# Altium PCB MDBT42Q - Copy.PcbDoc
Units mm, origin at the board's own origin, x right, y up, seen from the top; angles counter-clockwise.
Board outline 52.07 x 30.48 mm, 2 copper layers (Top Layer, Bottom Layer); 11 components, 14 nets, 82 pads, 3 vias.
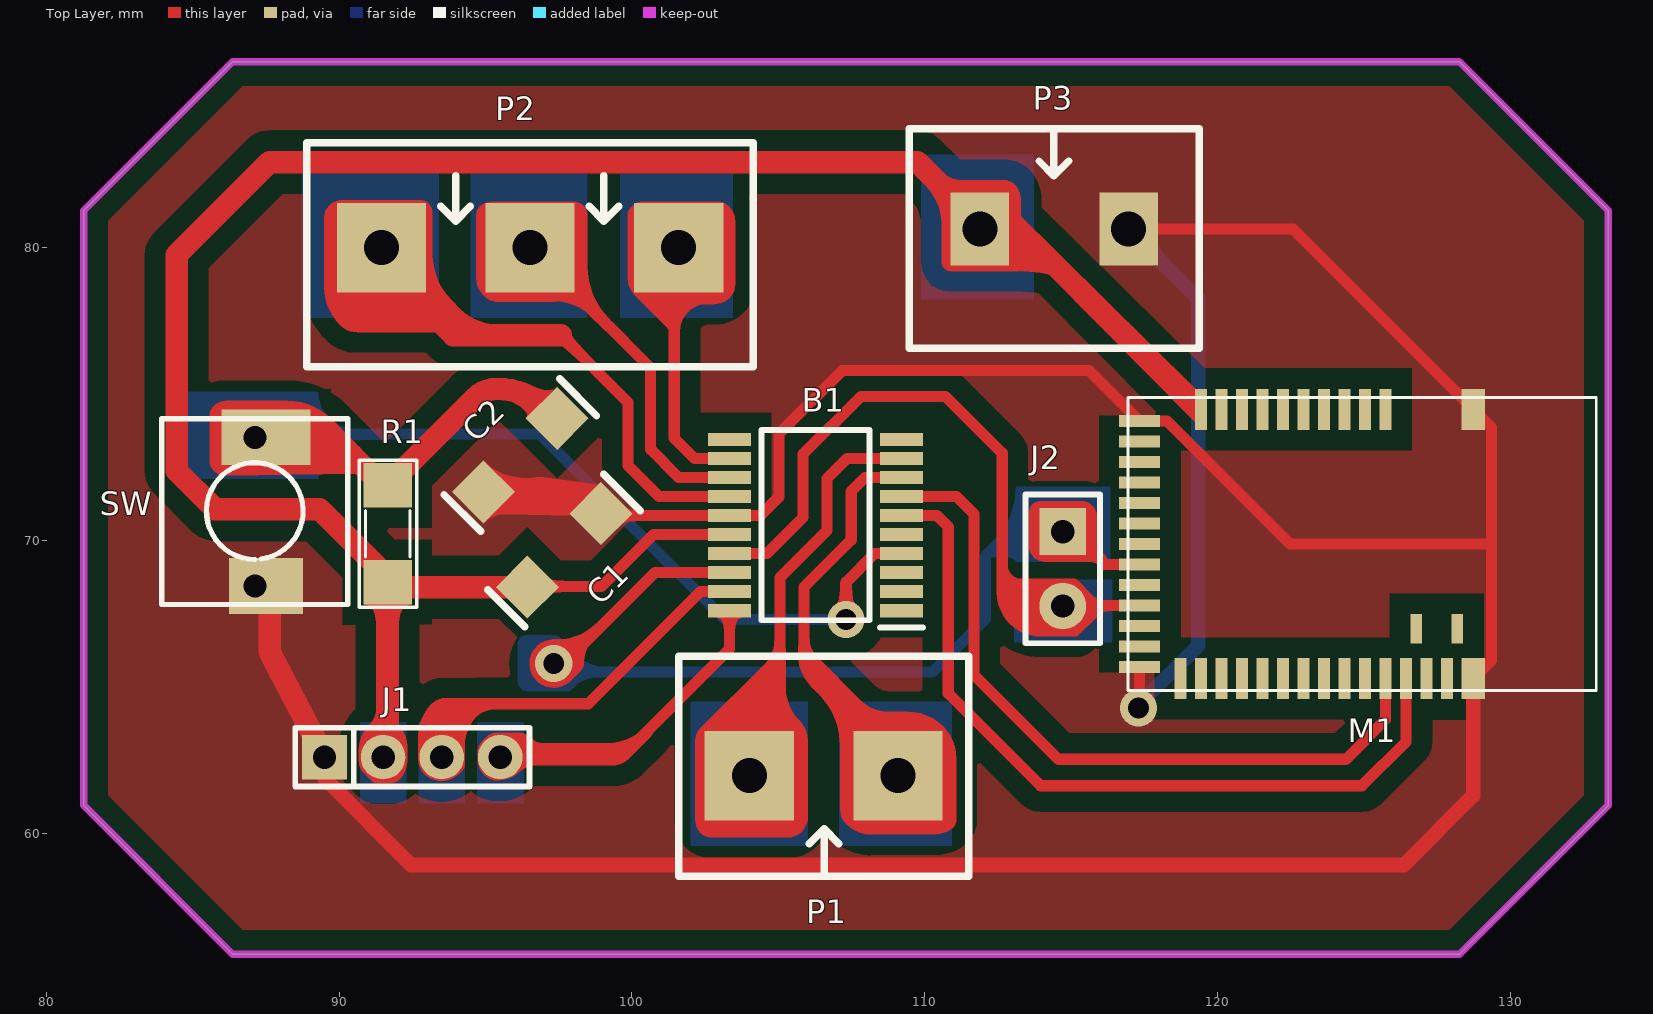
[diagram p0: Top Layer view]
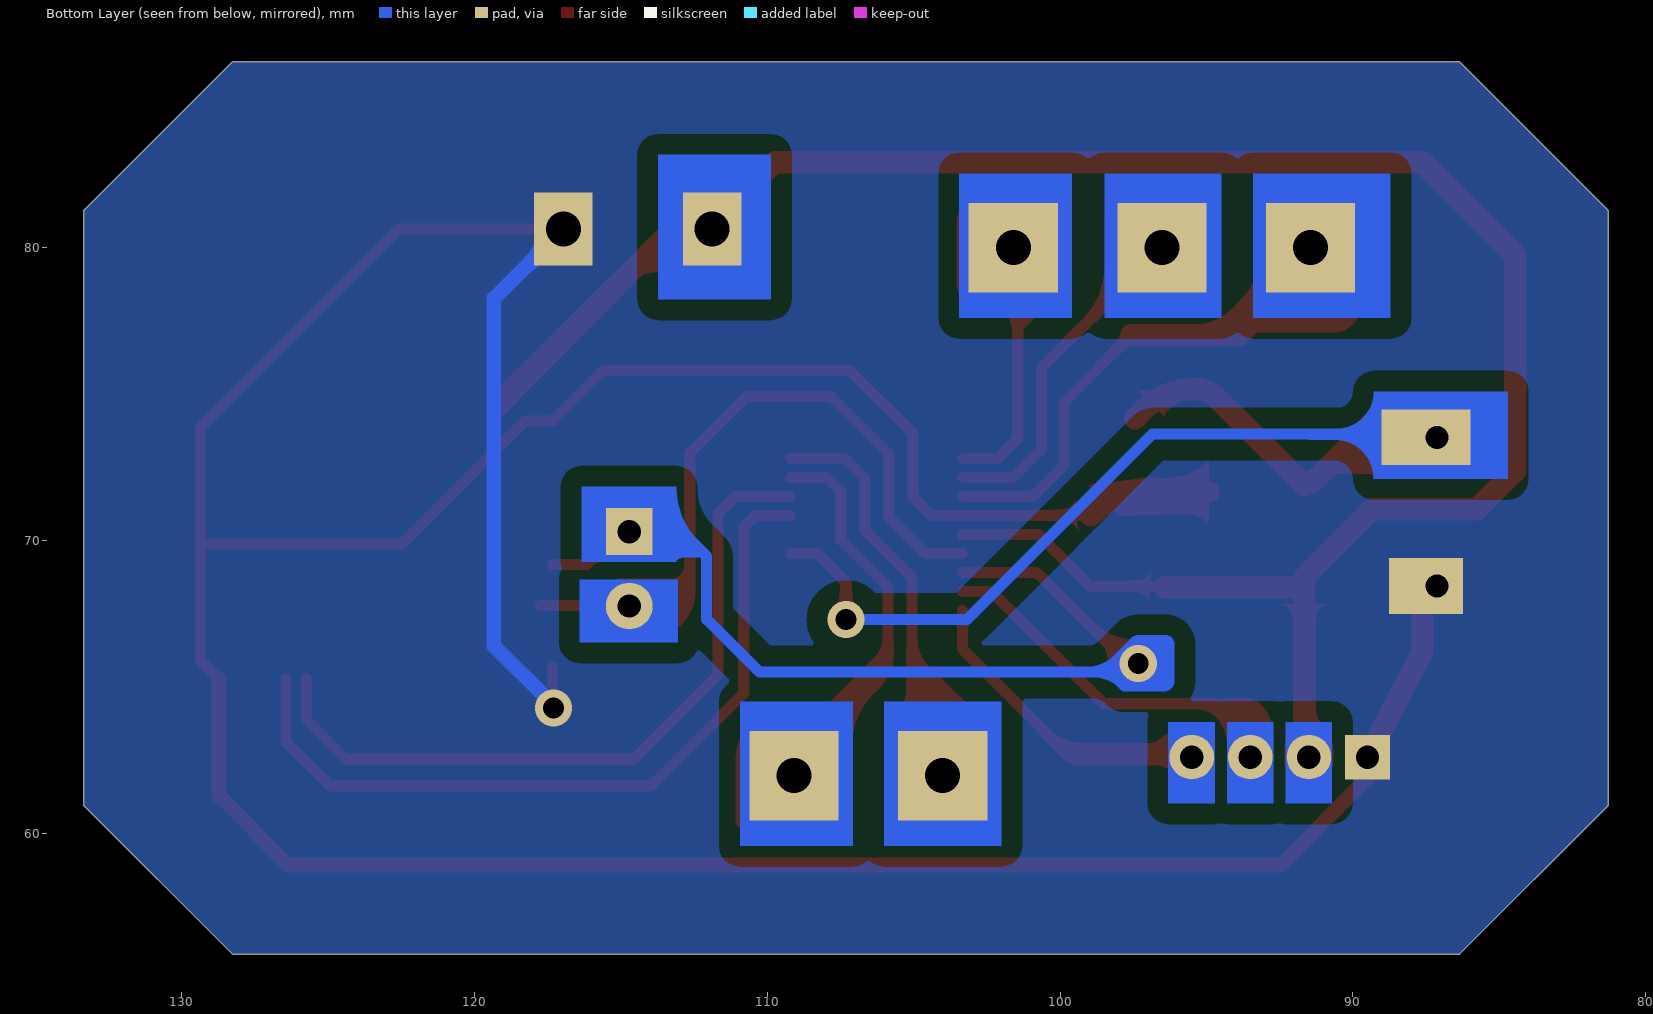
[diagram p1: Bottom Layer view, seen from below]
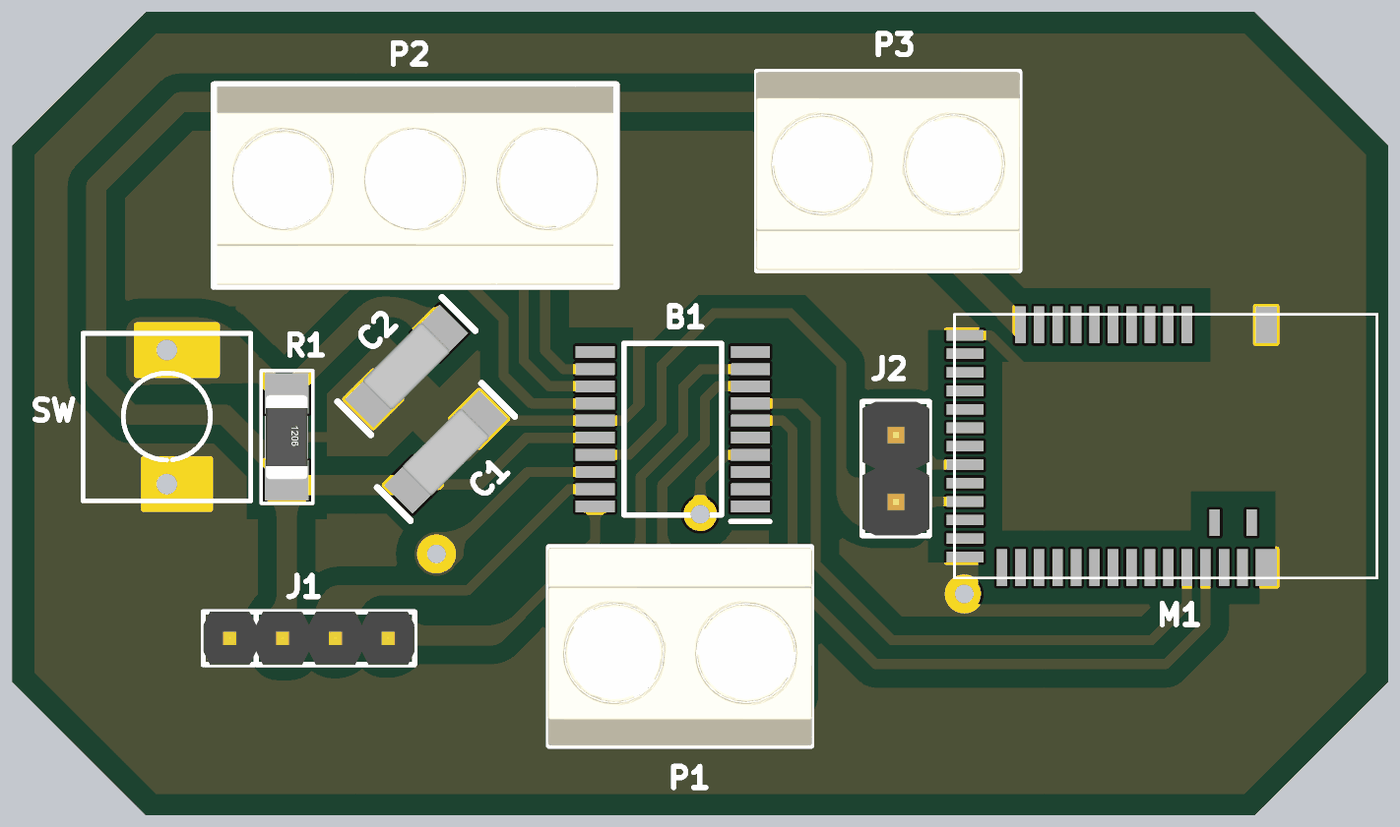
[diagram p2: 3D render of the assembled board from above, using the file's embedded part models]

## Layer stack, top to bottom
Top Solder: solder mask 0.0102, Solder Resist, Dk 3.5
Top Layer: signal copper 0.0356
Dielectric1: dielectric 0.32, FR-4, Dk 4.8
Bottom Layer: signal copper 0.0356
Bottom Solder: solder mask 0.0102, Solder Resist, Dk 3.5

## Board outline
81.28,60.96 86.36,55.88 128.27,55.88 133.35,60.96 133.35,81.28 128.27,86.36 86.36,86.36 81.28,81.28

## Design rules (kind name [scope] priority, off if disabled: settings)
Clearance Clearance_1 [InNamedPolygon('NONET_L01_P002')] p1: gap=0.7
Clearance [All] p2: gap=0.7
PlaneClearance [All] p1: clearance=1
PlaneConnect [All] p1: planeconnectstyle=Direct reliefexpansion=0.508 reliefentries=4 reliefconductorwidth=0.254 reliefairgap=0.254
PolygonConnect [All] p1: connectstyle=Direct reliefconductorwidth=0.254 reliefentries=4 polygonreliefangle="90 Angle" airgapwidth=0.254
RoutingVias [All] p1: holewidth=0.711 width=1.27 viastyle="Through Hole" minholewidth=0.711 minwidth=1.27 maxholewidth=0.711 maxwidth=1.27
SolderMaskExpansion [All] p1: expansion=0.102
Width [All] p1: maxlimit=0.762 minlimit=0.381 preferedwidth=0.508
28 further rules are at their usual default settings.

## Classes and differential pairs
component class MDBT42Q: B1 C1 C2 J1 J2 P1 P2 P3 R1 SW

## Components (designator, comment, footprint, x,y, rotation, side; value= is the part's Value field where it differs from the comment)
B1 "STM32F070F6P6" SOP65P640X120-20N 106.274,70.536 r180 top
C1 "10u" C1206 97.688,69.672 r45 top
C2 "100n" C1206 96.19,72.923 r225 top
J1 "JP4x1-2.0" J4-D1T 92.504,62.611 r0 top
J2 "JP2" JP2-D1T 114.72,70.31 r270 top
M1 "MODULE_MDBT42Q" PCB_MDBT42Q_10X16 132.94,69.89 r270 top
P1 "Header 2 - M" "Medium - Header 2"#1 106.553,61.976 r180 top
P2 "Header 3 - M" "Medium - Header 3" 101.6,80.01 r180 top
P3 "Header 4 - M" "Medium - Header 2"#2 114.427,80.645 r0 top
R1 "RESISTOR SMD" RES-SM-1206 91.66,71.89 r270 top
SW "SW" SW2 87.122,73.533 r270 top

## Footprints (in the part's own frame and the unit in brackets; to place one, negate y for a bottom-side part, rotate by r counter-clockwise, add the part's x,y. Pads: shape width x height; smd on the part's side, far side on the other; paste and mask are expansions set on the pad)
C1206 [mil]
  rect 60x60 smd: 1(-70,0) 2(70,0)
  silkscreen extent -110,-35 110,35, body extent -63,-35 63,35, height 40
J4-D1T [mm] "4 pins, 1 row, straight, gold plating"
  rect 1.524x1.524 hole 0.8: 1(-3,0)
  round 1.524 hole 0.8: 2(-1,0) 3(1,0) 4(3,0)
  silkscreen extent -4,-1 4,1, body extent -4,-1 4,1, height 6.01
JP2-D1T [mm] "2 pins, 1 row, straight, gold plating"
  rect 1.6x1.6 hole 0.8: 1(0,0)
  round 1.6 hole 0.8: 2(2.54,0)
  silkscreen extent -1.27,-1.27 3.81,1.27, body extent -1.27,-1.27 3.81,1.27, height 8.54
"Medium - Header 2"#1 [mil]
  rect 120x120 hole 47.24: 1(-100,0) 2(100,0)
  silkscreen extent -195,-161 195,135, body extent -197,-160 197,135, height 394
"Medium - Header 2"#2 [mil]
  rect 78.74x98.43 hole 47.24: 1(-100,0) 2(100,0)
  silkscreen extent -195,-160 195,135, body extent -197,-160 197,135, height 394
"Medium - Header 3" [mil]
  rect 120x120 hole 47.24: 1(0,0) 2(200,0) 3(399.5,0)
  silkscreen extent -100,-141 500,160, body extent -95,-138 495,157, height 394
PCB_MDBT42Q_10X16 [mm]
  rect 1.4x0.8 smd: 1(-4.6,-4.2) 39(4.6,-4.2)
  rect 1.4x0.4 smd: 2(-4.6,-7.2) 3(-4.6,-7.9) 4(-4.6,-8.6) 5(-4.6,-9.3) 6(-4.6,-10) 7(-4.6,-10.7) 8(-4.6,-11.4) 9(-4.6,-12.1) 10(-4.6,-12.8) 11(-4.6,-13.5) 25(4.6,-14.2) 26(4.6,-13.5) 27(4.6,-12.8) 28(4.6,-12.1) 29(4.6,-11.4) 30(4.6,-10.7) 31(4.6,-10) 32(4.6,-9.3) 33(4.6,-8.6) 34(4.6,-7.9) 35(4.6,-7.2) 36(4.6,-6.5) 37(4.6,-5.8) 38(4.6,-5.1)
  rect 0.4x1.4 smd: 12(-4.2,-15.6) 13(-3.5,-15.6) 14(-2.8,-15.6) 15(-2.1,-15.6) 16(-1.4,-15.6) 17(-0.7,-15.6) 18(0,-15.6) 19(0.7,-15.6) 20(1.4,-15.6) 21(2.1,-15.6) 22(2.8,-15.6) 23(3.5,-15.6) 24(4.2,-15.6)
  rect 1x0.4 smd: 40(2.9,-4.75) 41(2.9,-6.15)
  silkscreen extent -5,-16 5,0
RES-SM-1206 [mil]
  rect 60x65 smd: 1(0,0) 2(130,0)
  silkscreen extent -34,-38 164,39, body extent 2,-31 128,32, height 40
SOP65P640X120-20N [mm]
  rect 1.475x0.45 smd: 1(-2.938,2.925) 2(-2.938,2.275) 3(-2.938,1.625) 4(-2.938,0.975) 5(-2.938,0.325) 6(-2.938,-0.325) 7(-2.938,-0.975) 8(-2.938,-1.625) 9(-2.938,-2.275) 10(-2.938,-2.925) 11(2.938,-2.925) 12(2.938,-2.275) 13(2.938,-1.625) 14(2.938,-0.975) 15(2.938,-0.325) 16(2.938,0.325) 17(2.938,0.975) 18(2.938,1.625) 19(2.938,2.275) 20(2.938,2.925)
  silkscreen extent -3.68,-3.25 1.85,3.5
SW2 [mil] "SW button 2pin, 250x 250 mil"
  rect 75x120 hole 31 copper offset 0,15: 1(0,0)
  rect 75x100 hole 31 copper offset 0,15: 2(200,0)
  silkscreen extent -25,-125 225,125

## Part data
B1: "STMICROELECTRONICS - STM32F070F6P6 - MCU, 32BIT, CORTEX-M0, 48MHZ, TSSOP-20"
C1 C2: library part "Cap SMD 1206"
J1: "WR-PHD 2.00 mm Socket Header"
J2: "WR-PHD 2.54 mm Angled Socket Header"
M1: "MDBT42Q"
P1: "Header, 2-Pin, Medium"
P2: "Header, 3-Pin, Medium"
P3: library part "Header 2 - M", "Header, 2-Pin, Medium"
R1: "Resistor"
SW: library part "Tact SW - 2Pin", "Switch button 2 pin"

## Via types
v1: diameter 1.27, hole 0.711, Top Layer to Bottom Layer, 3 vias

## Nets (pads, with @x,y where several pads share a name; then routed paths per layer and width w, separated by ;. In a path a pad name is that pad's centre, name@x,y a point inside that pad or via, vN(x,y) a via of type N, cw(c..) or ccw(c..) an arc to the next point about the centre after c; other vN are vias at no path point)
32>52: B1.17 J2.2 M1.21 | length 23.6
  Top Layer w0.381: B1.17 104.613,69.561 105.85,70.798 105.85,72.957 107.823,74.93 110.714,74.93 112.65,72.994 112.65,68.21 113.12,67.74 J2.2@114.39,67.74 ; J2.2@114.44,67.79 M1.21 M1.21@117.75,67.79
52>32: B1.18 J2.1 M1.19 | length 36.4
  Top Layer w0.254: 97.972,66.095 cw(c97.331,65.805) 98.035,65.805 cw(c97.331,65.805) 97.972,66.095
  Top Layer w0.381: v1(97.331,65.805) 97.682,65.805 97.972,66.095 100.788,68.911 B1.18 ; J2.1@114.13,70.28 115.09,70.28 116.18,69.19 M1.19
  Bottom Layer w0.381: v1(97.331,65.805) 97.303,65.805 97.594,65.515 110.275,65.515 112.08,67.32 112.08,69.47 112.89,70.28 114.16,70.28 J2.1@114.75,69.69
+3.3V: B1.16 C1.1 J1.2 M1.11 P3.1 R1.2 | length 74.3
  Top Layer w0.381: R1.2@91.719,68.529 91.74,68.55 R1.2@91.875,68.415 ; C1.1 96.456,68.44 98.969,68.44 100.74,70.211 B1.16 ; P3.1 113.086,80.645 M1.11@119.241,74.49
  Top Layer w0.5: J1.2 ccw(c91.127,62.988) J1.2@91.66,62.988
  Top Layer w0.762: J1.2@91.66,62.988 R1.2 ccw(c91.269,68.588) 91.545,68.865 89.33,71.08 85.765,71.08 84.455,72.39 84.455,79.756 87.63,82.931 109.753,82.931 P3.1@111.963,80.721 ; R1.2@91.875,68.415 C1.1
CLK: B1.20 J1.4 | length 10.7
  Top Layer w0.381: J1.4 99.648,62.611 103.336,66.299 B1.20
DIO: B1.19 J1.3 | length 12.5
  Top Layer w0.381: J1.3 93.504,63.219 94.718,64.433 98.513,64.433 102.341,68.261 B1.19
GND: B1.15 C1.2 C2.2 J1.1 M1.1 M1.12 M1.24 M1.39 P3.2 SW.2 | length 136.7
  Top Layer w0.381: C1.2@98.946,70.861 B1.15 104.389,70.861 105.03,71.502 105.03,73.661 107.188,75.819 115.611,75.819 M1.12 118.28,74.09 122.48,69.89 129.36,69.89 ; P3.2 122.585,80.645 M1.1 129.36,73.87 129.36,69.89 ; v1(117.31,64.29) 117.34,64.32 M1.24 ; M1.39 129.36,65.91 129.36,69.89
  Top Layer w0.5: J1.1 89.504,61.88 92.46,58.924 126.364,58.924 128.74,61.3 M1.39
  Top Layer w0.762: SW.2@87.63,68.58 87.63,66.214 J1.1 ; C2.2 97.088,71.666 cw(c97.088,69.126) 98.877,70.929 cw(c97.088,69.126) 98.884,70.922 C1.2@98.946,70.861
  Bottom Layer w0.5: P3.2 119.34,78.272 119.34,66.42 117.385,64.465 v1@117.385,64.215
MD_RESET: B1.7 M1.35 | length 25.4
  Top Layer w0.381: B1.7 111.089,71.511 111.69,70.91 111.69,65.419 114.574,62.536 124.386,62.536 125.74,63.89 M1.35
NetB1_4: B1.4 C2.1 R1.1 SW.1 | length 38.2
  Top Layer w0.381: R1.1@91.563,71.987 R1.1 R1.1@91.74,71.81 ; v1(107.315,67.31) 107.315,68.58 108.296,69.561 B1.4
  Top Layer w0.762: SW.1@87.63,73.66 88.655,73.66 cw(c88.655,71.12) 89.584,73.484 cw(c88.655,71.12) 90.451,72.916 91.38,71.987 R1.1@91.563,71.987 ; R1.1 94.645,74.875 cw(c95.392,74.128) 95.392,75.184 cw(c95.392,72.644) 97.188,74.44 C2.1
  Bottom Layer w0.381: SW.1@87.53,73.64 87.63,73.64 96.85,73.64 103.18,67.31 v1(107.315,67.31)
PWM_WHITE: B1.12 P2.1 | length 8.7
  Top Layer w0.381: P2.1 101.448,79.858 101.448,73.508 102.144,72.811 B1.12
PWM_X: B1.14 P2.3 | length 17
  Top Layer w0.381: 97.58,77.02 99.873,74.727 99.873,72.568 100.93,71.511 B1.14
  Top Layer w0.762: P2.3 91.453,79.471 93.904,77.02 97.58,77.02
PWM_YELLOW: B1.13 P2.2 | length 11.7
  Top Layer w0.381: P2.2 100.635,75.895 100.635,73.127 101.601,72.161 B1.13
SWDCLK: B1.6 M1.36 | length 27.2
  Top Layer w0.381: B1.6 110.416,70.861 110.81,70.467 110.81,64.78 113.956,61.634 124.944,61.634 126.44,63.13 M1.36
USART2_RX: B1.9 P1.2 | length 14.2
  Top Layer w0.381: P1.2 103.81,62.179 103.81,64.55 105.06,65.8 105.06,68.738 106.67,70.348 106.67,72.126 107.355,72.811 B1.9
USART2_TX: B1.8 P1.1 | length 13.6
  Top Layer w0.381: P1.1 109.093,62.767 105.88,65.98 105.88,68.415 107.493,70.028 107.493,71.683 107.971,72.161 B1.8
pads on no net: B1.1 B1.2 B1.3 B1.5 B1.10 B1.11 M1.2 M1.3 M1.4 M1.5 M1.6 M1.7 M1.8 M1.9 M1.10 M1.13 M1.14 M1.15 M1.16 M1.17 M1.18 M1.20 M1.22 M1.23 M1.25 M1.26 M1.27 M1.28 M1.29 M1.30 M1.31 M1.32 M1.33 M1.34 M1.37 M1.38 M1.40 M1.41

## Polygon pours and split planes (outlines as drawn)
GND on Top Layer "GND_L01_P009" (solid, pour order 9): 86.36,86.36 81.28,81.28 81.28,60.96 86.36,55.88 128.27,55.88 133.35,60.96 133.35,81.28 128.27,86.36
GND on Bottom Layer "GND_L02_P007" (solid, pour order 7): 86.36,86.36 128.27,86.36 133.35,81.28 133.35,60.96 128.27,55.88 86.36,55.88 81.28,60.96 81.28,81.28

## Keep-outs
Top Layer:
  the board outline again, w0.254

## Other copper
Top Layer:
  region net +3.3V: 114.254,79.09 119.28,74.02 119.25,75.19 113.12,81.25
  region: 88.138,65.405
  region net GND: 98.171,71.819
  region: 92.369,69.633
  region net NetB1_4: 90.594,73.306 89.757,74.143 ccw(c88.229,72.615) 88.229,74.776 86.117,74.776 ccw(c86.117,74.239) 85.58,74.239 85.58,72.755 ccw(c86.121,72.755) 86.121,72.214 90.552,72.285 90.892,72.259
  region net 32>52: 112.84,69.16 ccw(c113.3,69.16) 113.3,68.7 114.082,68.7 ccw(c114.311,68.432) 113.96,68.46 ccw(c113.973,68.143) 113.74,68.358 113.74,67.791 ccw(c113.651,67.791) 113.651,67.88 112.69,67.88
  region net 32>52: 114.164,66.73 113.97,66.73 cw(c113.97,68.24) 112.46,68.24 113.74,67.791
  region net 32>52: 116.1,67.97 cw(c116.1,68.453) 115.759,68.111 115.21,68.66 ccw(c115.113,68.563) 115.113,68.7 114.12,68.7 ccw(c114.12,68.32) 113.74,68.32 113.74,67.262 ccw(c114.27,67.26) 114.27,66.73 115.22,66.73 115.949,67.459 cw(c116.29,67.117) 116.29,67.6
  region net 52>32: 115.89,70.81 ccw(c115.35,70.81) 115.35,71.35 113.96,71.35 ccw(c113.96,70.96) 113.57,70.96 113.57,69.814 ccw(c114.094,69.814) 114.094,69.29 114.8,69.29 115.41,69.29 115.724,69.268 cw(c115.594,68.669) 116.11,69 ccw(c115.941,69.169) 116.18,69.169 116.18,69.47 cw(c116.88,70.17) 115.89,70.17
  region net +3.3V: 113.28,81.21 ccw(c114.511,81.21) 113.641,80.339 115.23,78.75 115.125,78.645 cw(c114.92,78.85) 114.92,78.56 114.25,79.23 ccw(c113.14,78.121) 113.14,79.69
  region net GND: 99.036,71.892 96.856,72.182 cw(c96.414,74.356) 94.937,72.7 ccw(c94.975,72.662) 94.921,72.662 94.921,70.592 cw(c95.692,69.821) 95.692,70.911 97.994,70.849
  region net +3.3V: 91.275,67.212 91.275,64.274 cw(c90.539,64.274) 91.059,63.754 ccw(c91.979,62.834) 90.678,62.834 90.678,62.484 ccw(c91.291,62.484) 90.858,62.05 91.096,61.812 ccw(c91.313,62.029) 91.313,61.722 91.768,61.722 ccw(c91.768,62.156) 92.075,61.849 ccw(c91.462,62.462) 92.329,62.462 92.329,63.014 ccw(c91.462,63.014) 92.075,63.627 cw(c92.16,63.712) 92.04,63.712 92.04,64.47
  region net PWM_YELLOW: 97.907,81.57 cw(c97.907,81.297) 98.1,81.49 cw(c97.955,81.345) 98.16,81.345 98.16,79.692 ccw(c100.7,79.692) 98.904,77.896 99.7,77.1 ccw(c99.434,76.834) 99.434,77.21 99.31,77.21 cw(c99.31,77.331) 99.225,77.245 98.392,78.078 ccw(c97.59,77.275) 97.59,78.41 95.111,78.41 cw(c95.111,78.581) 94.99,78.46 cw(c95.231,78.701) 94.89,78.701 94.89,81.247 cw(c95.163,81.247) 94.97,81.44 95.043,81.513 cw(c95.18,81.377) 95.18,81.57
  region: 94.89,64.62 93.629,64.62 ccw(c93.629,63.971) 93.17,64.43 ccw(c94.281,63.319) 92.71,63.319 92.71,62.523 ccw(c93.393,62.523) 92.91,62.04 92.927,62.023 ccw(c93.49,62.587) 93.49,61.79 ccw(c93.49,62.659) 94.105,62.045 94.19,62.13 ccw(c93.949,62.371) 94.29,62.371 94.29,63.014 cw(c95.656,63.014) 94.69,63.98 cw(c95.318,63.352) 95.318,64.24 95.43,64.24
  region net CLK: 100.42,63.61 cw(c99.165,64.865) 99.165,63.09 96.946,63.09 cw(c96.946,63.636) 96.56,63.25 ccw(c96.077,62.767) 96.077,63.45 95.41,63.45 ccw(c95.41,62.919) 95.034,63.294 94.9,63.16 ccw(c95.31,62.75) 94.73,62.75 94.73,62.523 ccw(c95.413,62.523) 94.93,62.04 94.994,61.976 ccw(c95.37,62.351) 95.37,61.82 95.492,61.82 ccw(c95.492,62.708) 96.12,62.08 cw(c96.724,61.476) 96.724,62.33 99.359,62.33 ccw(c99.359,63.081) 99.89,62.55 100.638,63.298 ccw(c100.416,63.52) 100.73,63.52
  region net PWM_X: 90.09,81.63 92.817,81.63 cw(c92.817,81.337) 93.024,81.544 93.071,81.498 cw(c92.783,81.21) 93.19,81.21 93.19,79.789 ccw(c95.427,79.789) 93.845,78.207 94.127,77.926 ccw(c95.42,79.218) 95.42,77.39 95.42,76.882 cw(c95.318,76.882) 95.39,76.81 ccw(c94.642,76.062) 94.642,77.12 90.619,77.12 cw(c90.619,77.939) 90.04,77.36 cw(c91.344,78.664) 89.5,78.664 89.5,81.082 cw(c89.978,81.082) 89.64,81.42 89.68,81.46 cw(c90.09,81.051)
  region net PWM_YELLOW: 95.142,81.566 97.929,81.566 cw(c97.929,81.319) 98.104,81.494 cw(c97.582,80.972) 98.32,80.972 98.32,79.532 ccw(c100.86,79.532) 99.064,77.736 99.89,76.91 cw(c99.89,78.214) 98.968,77.292 98.57,77.69 ccw(c97.411,76.531) 97.411,78.17 95.33,78.17 cw(c95.33,78.58) 95.04,78.29 94.916,78.414 cw(c95.463,78.96) 94.69,78.96 94.69,81.13 cw(c95.1,81.13) 94.81,81.42 94.825,81.435 cw(c95.142,81.117)
  region net PWM_WHITE: 102.948,81.58 cw(c102.948,81.068) 103.31,81.43 cw(c102.779,80.899) 103.53,80.899 103.53,78.773 cw(c102.847,78.773) 103.33,78.29 cw(c102.823,78.797) 102.823,78.08 102.562,78.08 ccw(c102.562,77.158) 101.91,77.81 ccw(c102.562,77.158) 101.64,77.158 101.64,76.97 ccw(c101.592,76.922) 101.592,76.99 101.33,76.99 ccw(c100.92,76.99) 101.21,77.28 100.086,78.404 cw(c100.633,78.95) 99.86,78.95 99.86,81.129 cw(c100.201,81.129) 99.96,81.37 100.043,81.453 cw(c100.35,81.145) 100.35,81.58
  region net PWM_YELLOW: 97.907,81.575 98.013,81.575 cw(c98.013,81.113) 98.34,81.44 cw(c98.002,81.102) 98.48,81.102 98.48,79.377 ccw(c101.02,79.377) 99.224,77.581 99.305,77.501 ccw(c99.065,77.261) 99.065,77.6 98.94,77.6 cw(c98.94,77.721) 98.855,77.635 97.98,78.51
  region net +3.3V: 110.59,82.6 ccw(c111.29,83.3) 111.29,82.31 112.732,82.31 cw(c112.732,81.832) 113.07,82.17 cw(c112.563,81.663) 113.28,81.663 113.28,80.029 ccw(c114.845,81.318) 114.65,79.3 cw(c114.002,79.733) 114.435,79.085 cw(c114.386,80.316) 113.96,79.16 113.39,79.21 ccw(c113.355,79.126) 113.32,79.21 113.28,79.21 ccw(c113.239,79.111) 113.198,79.21 110.887,79.21 cw(c110.887,79.517) 110.67,79.3 cw(c110.887,79.517) 110.58,79.517 110.58,80.82 ccw(c108.771,80.821) 110.05,82.1
  region net 52>32: 97.3,66.63 97.466,66.63 ccw(c97.466,68.474) 98.77,67.17 98.77,66.75 98.721,66.701 ccw(c99.591,65.83) 98.36,65.83 cw(c97.974,65.83) 98.247,65.557 97.88,65.19
  region: 104.87,66.59 cw(c103.735,66.59) 104.538,65.788 102.34,63.59 ccw(c102.749,63.18) 102.17,63.18 102.17,60.469 ccw(c102.819,60.469) 102.36,60.01 ccw(c102.698,60.348) 102.698,59.87 105.355,59.87 ccw(c105.355,60.485) 105.79,60.05 ccw(c105.259,60.581) 106.01,60.581 106.01,63.174 ccw(c105.054,63.174) 105.73,63.85 cw(c106.889,65.009) 105.25,65.009 105.25,66.31
  region: 106.07,66.65 ccw(c106.939,66.65) 106.325,66.035 107.825,64.535 ccw(c108.73,65.44) 108.73,64.16 109.423,64.16 cw(c109.423,62.453) 110.63,63.66 cw(c109.544,62.574) 111.08,62.574 111.08,60.476 cw(c110.704,60.476) 110.97,60.21 cw(c110.415,60.765) 110.415,59.98 108.165,59.98 cw(c108.165,60.595) 107.73,60.16 107.549,60.341 cw(c108.078,60.87) 107.33,60.87 107.33,62.768 ccw(c104.79,62.768) 106.586,64.564 106.135,65.015 cw(c107.211,66.09) 105.69,66.09 105.69,66.383 cw(c105.827,66.383) 105.73,66.48
  region net USART2_TX: 108.165,59.968 cw(c108.165,61.133) 107.341,60.309 107.32,60.33 cw(c107.803,60.813) 107.12,60.813 107.12,62.973 ccw(c104.58,62.973) 106.376,64.769 106.358,64.787 cw(c106.39,64.754) 106.39,64.8 107.05,64.8 ccw(c107.919,64.8) 107.305,64.185 107.6,63.89
Bottom Layer:
  rectangle net 32>52: 113.05,66.53 116.41,68.67
  rectangle net 52>32: 113.11,69.28 116.35,71.85
  rectangle net PWM_X: 88.71,77.61 93.41,82.55
  rectangle net PWM_YELLOW: 94.49,77.61 98.49,82.55
  rectangle net PWM_WHITE: 99.59,77.61 103.447,82.55
  rectangle net +3.3V: 109.877,78.245 113.734,83.185
  rectangle net USART2_TX: 107.083,59.576 110.94,64.516
  rectangle net USART2_RX: 102.003,59.576 106.02,64.516
  rectangle: 92.72,61.03 94.31,63.81
  rectangle net +3.3V: 90.72,61.03 92.31,63.81
  rectangle net CLK: 94.72,61.03 96.31,63.81
  rectangle: 84.712,72.104 89.285,75.094
  region net 52>32: 113.11,71.85 113.11,71.797 cw(c110.57,71.797) 112.366,70.001 112.002,69.637 112.133,69.506 ccw(c112.322,69.696) 112.322,69.428 112.837,69.428 cw(c112.837,69.008) 113.134,69.305
  region net NetB1_4: 89.285,75.094 ccw(c90.558,75.094) 90.558,73.821 91.456,73.821 cw(c91.456,73.792) 91.485,73.792 91.485,73.454 90.636,73.454 ccw(c90.636,72.104) 89.285,72.104
  region net 52>32: 99.03,65.7 cw(c99.03,66.859) 98.211,66.039 97.58,66.67 ccw(c97.339,66.429) 97.339,66.77 96.4,66.77 ccw(c96.4,66.47) 96.1,66.47 96.1,65.2 ccw(c96.44,65.2) 96.44,64.86 97.82,64.86 ccw(c97.82,64.981) 97.905,64.895 97.98,64.97 cw(c98.849,64.101) 98.849,65.33 98.99,65.33

## Silkscreen, mask and mechanical layers (free items; w line width, h text height)
Mechanical 13:
  region: 89.812,69.22

## Text inside footprints (layer, text, board x,y; h text height)
M1: Mechanical 2 "No ground pad" at 131.05,72.505 h0.8 r270; Mechanical 3 "Toplayer no ground pad" at 125.165,72.69 h0.8 r270